# Altium PCB GATEWAY_PCB.PcbDoc (part 2 of 2)
Units mm, origin at the board's own origin, x right, y up, seen from the top; angles counter-clockwise.
Board outline 96.14 x 95.25 mm, 2 copper layers (Top Layer, Bottom Layer); 195 components, 120 nets, 640 pads, 100 vias.
Unrouted connection lines stored in the file: 256.
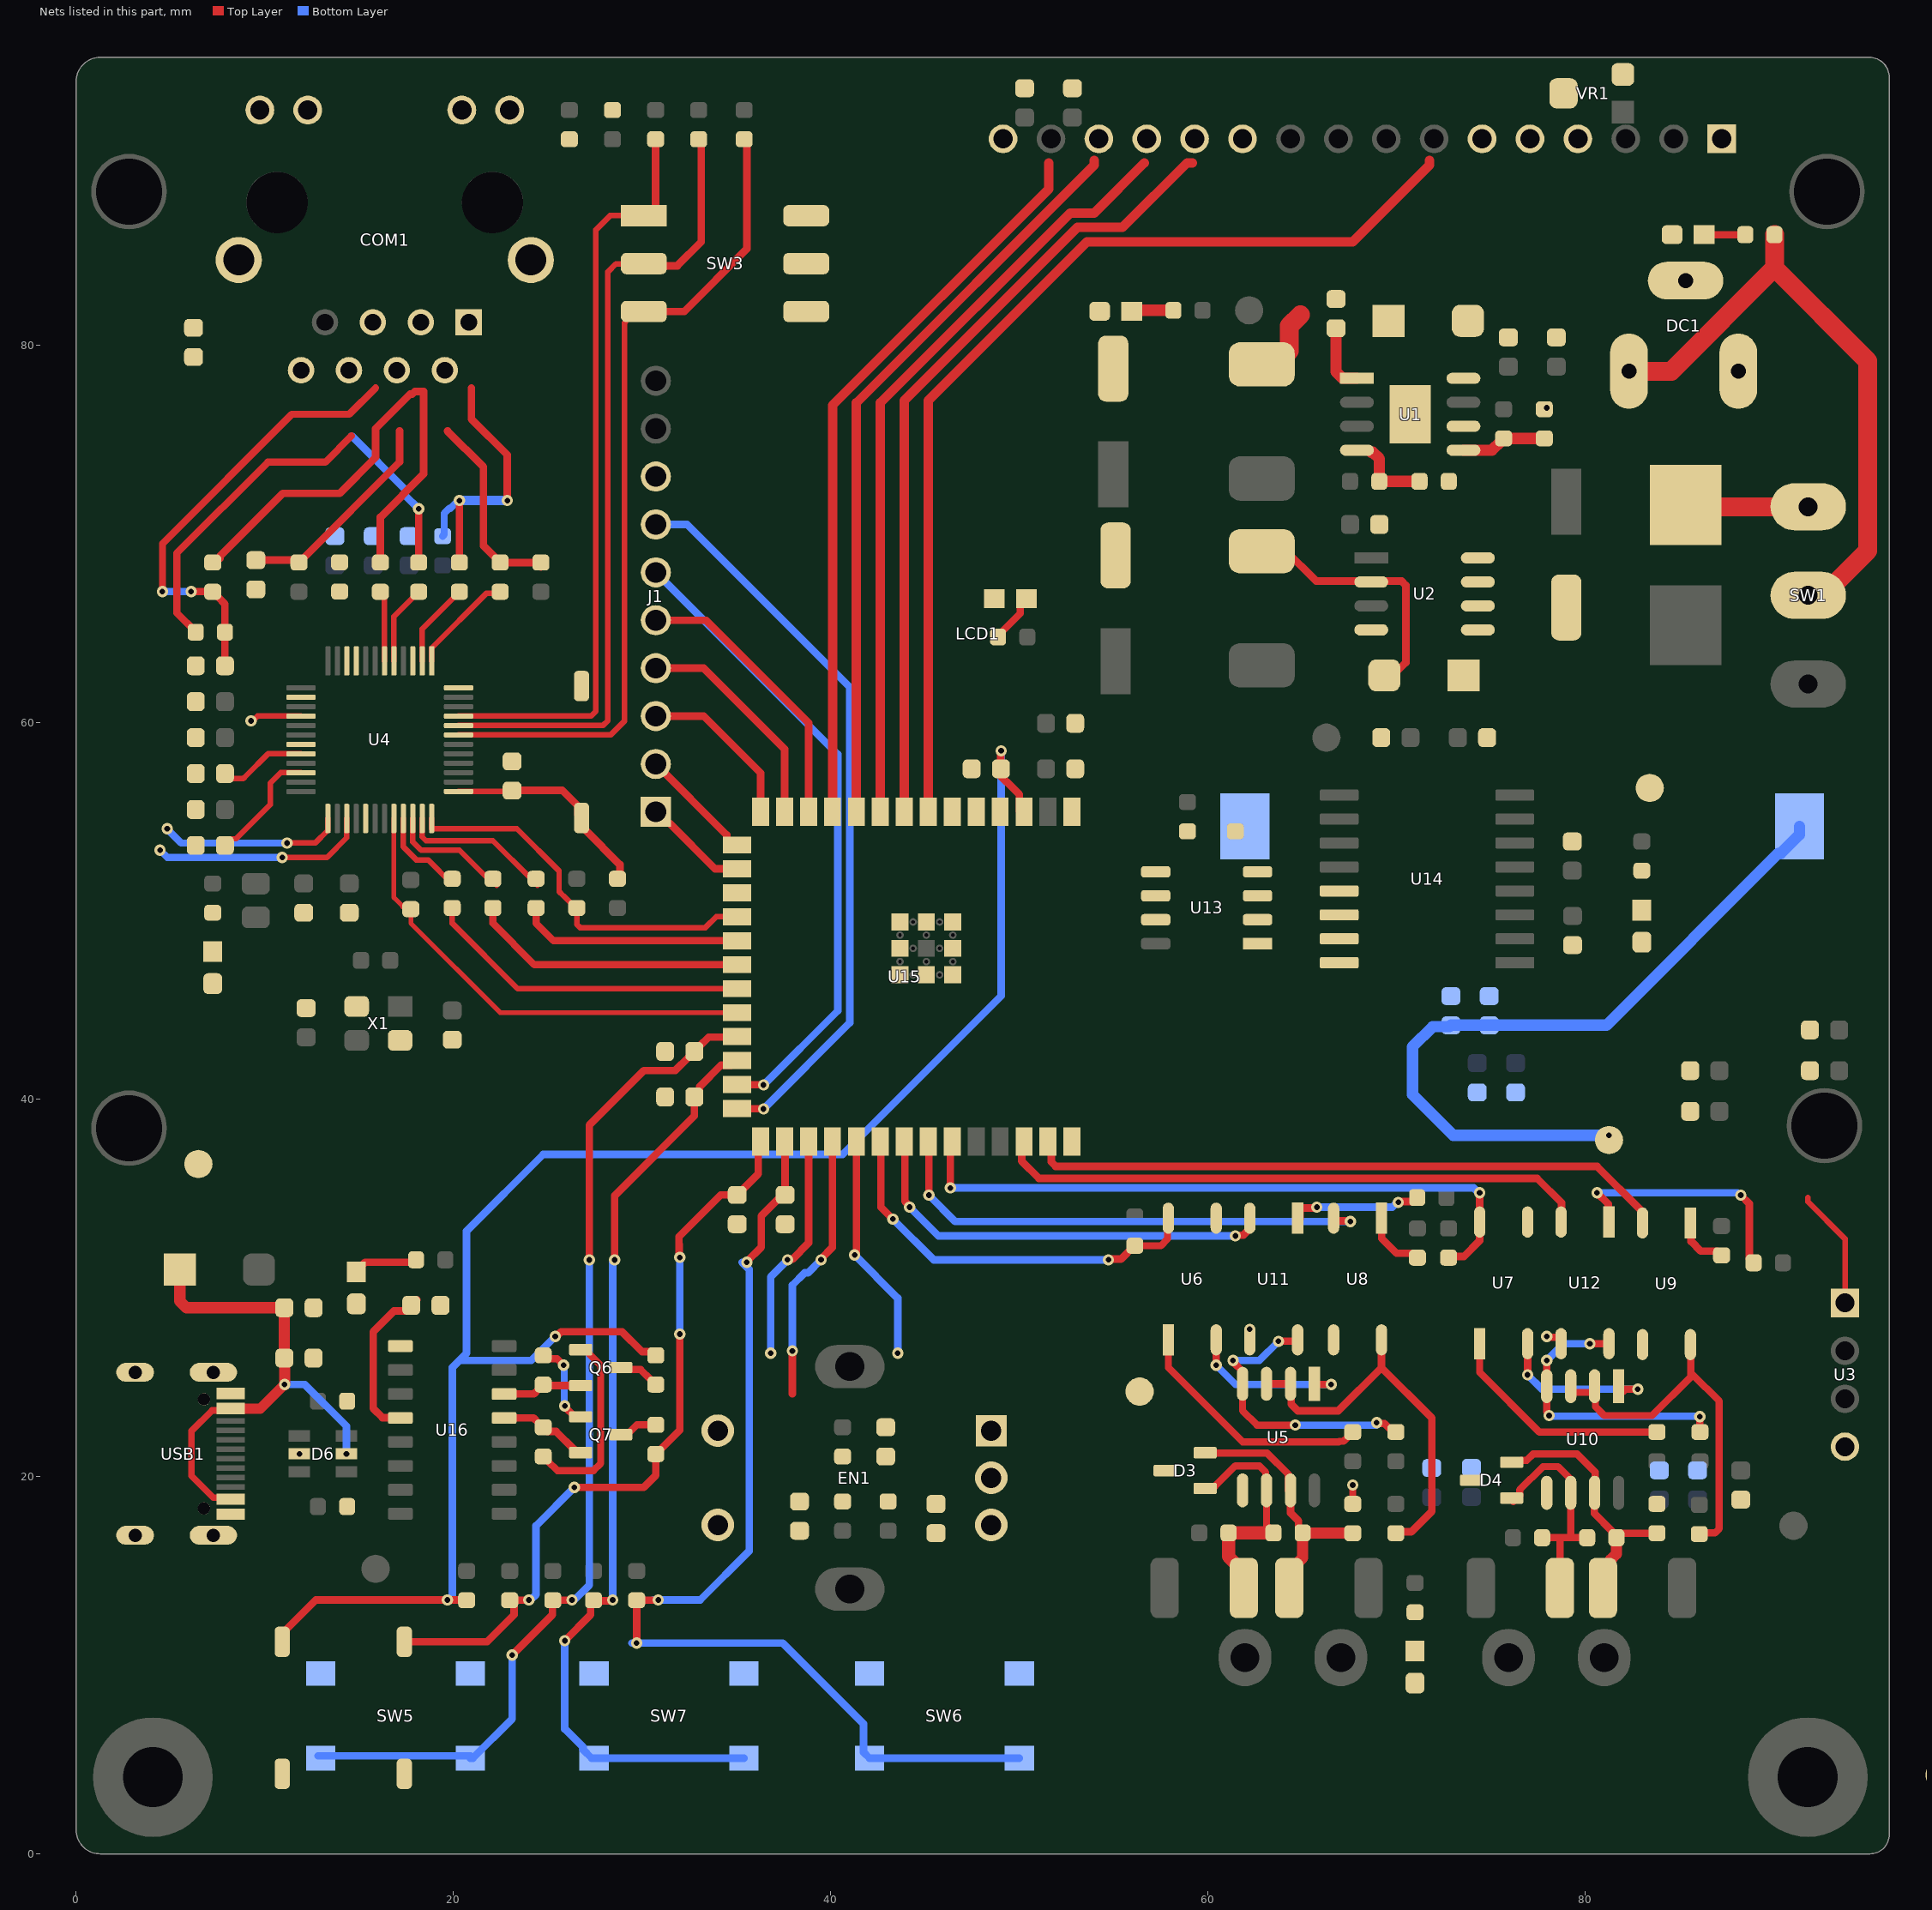
[diagram p2: the nets of this part, all layers, seen from the top]

## Via types
v1: diameter 0.6, hole 0.3, Top Layer to Bottom Layer, tented both sides, 85 vias
v2: diameter 0.6, hole 0.3, Top Layer to Bottom Layer, 14 vias
v3: diameter 0.25, hole 0.15, Top Layer to Bottom Layer, 1 vias

## Nets (pads, with @x,y where several pads share a name; then routed paths per layer and width w, separated by ;. In a path a pad name is that pad's centre, name@x,y a point inside that pad or via, vN(x,y) a via of type N, cw(c..) or ccw(c..) an arc to the next point about the centre after c; other vN are vias at no path point) (continued)
DEBUG_EN: C56.2 R74.1 R75.1 SW8.2 U15.3 | length 92.9
  Top Layer w0.4: SW8.2@10.922,11.245 11.122,11.445 11.122,11.884 12.7,13.462 v1@19.939,13.462 ; v1(19.685,13.462) 20.688,13.462 R74.1@20.701,13.449 ; v1(25.4,27.432) 25.454,27.432 25.708,27.686 28.944,27.686 30.006,26.624 30.539,26.624 R75.1@30.734,26.429 ; v1(49.048,58.484) 49.028,58.464 49.028,57.156 49.035,57.15 49.035,57.125 49.31,56.85 49.335,56.85 50.012,56.173 50.012,55.28 U15.3@50.056,55.237 ; U15.3@50.183,54.729 U15.3@50.187,54.724
  Bottom Layer w0.4: v1@19.939,13.462 19.939,25.781 20.32,26.162 ; v1(25.4,27.432) 24.13,26.162 20.32,26.162 ; v1(49.048,58.484) 49.048,45.492 40.64,37.084 24.765,37.084 20.701,33.02 20.701,26.543 20.32,26.162
DEBUG_FLASH: C58.2 R80.1 R81.2 SW9.2 U15.27 | length 39.6
  Top Layer w0.4: SW9.2@17.399,11.245 21.786,11.245 23.217,12.676 R81.2@23.217,13.298 ; R81.2@22.993,13.456 R81.2@23.247,13.456 ; R81.2@23.09,13.298 R81.2@23.247,13.456 ; v1(24.003,13.462) 23.997,13.456 R81.2@23.247,13.456 ; v1(26.416,19.431) 30.096,19.431 30.731,20.066 R80.1@30.731,21.193 ; R80.1@30.734,21.196 30.759,21.196 30.984,21.421 30.984,21.446 32.004,22.466 v1(32.004,27.559) ; v1(32.004,31.623) 31.966,31.661 31.966,32.318 31.961,32.323 31.961,32.723 34.176,34.938 C58.2@35.052,34.938 36.171,36.057 U15.27@36.171,37.056
  Bottom Layer w0.4: v1@24.098,13.462 24.384,13.748 24.384,17.399 v1(26.416,19.431) ; v1(32.004,27.559) v1(32.004,31.623)
DI1: R46.1 U5.4 U11.4 | length 15.3
  Top Layer w0.381: v1(61.341,26.162) 61.383,26.12 61.383,26.048 61.849,25.582 U5.4@61.849,24.923 61.849,23.495 62.611,22.733 v2(64.643,22.733) ; v1(63.754,27.178) 64.693,27.178 U11.4@64.77,27.255 ; v2(68.961,22.86) 69.003,22.818 69.372,22.818 69.825,22.365 R46.1@69.85,22.365
  Bottom Layer w0.381: v1@61.348,26.169 62.745,26.169 v1(63.754,27.178) ; v2(64.643,22.733) 64.664,22.733 64.674,22.743 64.684,22.733 v2@68.961,22.733
DI2: R48.1 U10.4 U12.4 | length 15.6
  Top Layer w0.381: v2(77.978,26.162) U10.4@77.978,24.796 77.978,23.427 78.105,23.3 v2(78.105,23.241) ; v2(80.264,27.051) U12.4@81.28,27.051 ; R48.1@86.106,22.365 R48.1@86.106,22.44
  Top Layer w0.4: v2(86.094,23.181) 86.1,23.176 86.1,22.371 R48.1@86.106,22.365
  Bottom Layer w0.381: v2(77.978,26.162) 78.867,27.051 v2(80.264,27.051) ; v2(78.105,23.241) 78.135,23.211 86.065,23.211 v2(86.094,23.181)
DTR: Q7.2 R76.1 U16.13 | length 4.5
  Top Layer w0.4: U16.13@22.689,23.114 24.253,23.114 24.515,22.852 24.515,22.844 R76.1@24.711,22.648 ; R76.1@24.765,22.619 24.99,22.394 25.446,22.394 26.438,21.402 Q7.2@26.499,21.402
EN1: R41.1 U5.2 U5.3 U8.4 | length 20.8
  Top Layer w0.4: U5.3@63.119,24.923 U5.2@64.389,24.923 64.427,24.885 64.427,23.838 64.77,23.495 66.929,23.495 69.215,25.781 ; U8.4@69.215,27.255 69.215,25.781 ; R41.1@69.977,17.005 70.044,17.072 70.793,17.072 71.882,18.161 71.882,23.114 69.215,25.781
EN1_RS485: U8.2 U15.34 | length 26.7
  Top Layer w0.4: v1(45.212,34.925) U15.34@45.212,37.759 ; U8.2@66.684,33.622 66.74,33.566 67.526,33.566 v1(67.564,33.528)
  Bottom Layer w0.4: v1(45.212,34.925) 46.609,33.528 v1(67.564,33.528)
EN2: R43.1 U9.4 U10.2 U10.3 | length 19.5
  Top Layer w0.381: U10.3@79.502,24.465 80.518,24.465 80.56,24.423 80.56,23.707 81.026,23.241 83.566,23.241 85.618,25.293 85.618,25.507 ; U9.4@85.618,26.981 85.618,25.507 ; R43.1@86.16,17.018 86.899,17.018 87.122,17.241 87.122,24.003 85.725,25.4 85.618,25.507
EN2_RS485: U9.2 U15.39 | length 34.2
  Top Layer w0.4: U15.39@51.532,37.759 51.705,37.586 51.705,36.683 51.939,36.449 80.645,36.449 82.958,34.136 82.958,34.13 83.058,34.03 U9.2@83.058,33.451
ENC_CLK: C47.2 EN1.A R69.1 U15.31 | length 12.2
  Top Layer w0.4: v1(41.275,31.75) 41.275,31.804 41.372,31.901 U15.31@41.372,37.759
  Bottom Layer w0.4: v1(41.275,31.75) 43.561,29.464 v1(43.561,26.543)
ENC_DATA: C48.2 EN1.B R70.1 U15.30 | length 14.4
  Top Layer w0.4: 37.973,24.384 v1(37.973,26.67) ; v1(39.497,31.496) 39.497,31.55 40.102,32.155 U15.30@40.102,37.759
  Bottom Layer w0.4: v1(37.973,26.67) 37.973,30.153 38.626,30.805 38.806,30.805 v1(39.497,31.496)
ENC_SW: C46.2 EN1.E R68.1 U15.29 | length 12.2
  Top Layer w0.4: v1(37.719,31.496) 37.757,31.534 37.98,31.534 38.832,32.387 U15.29@38.832,37.759
  Bottom Layer w0.4: v1(36.83,26.543) 36.83,30.597 37.719,31.486 v1(37.719,31.496)
GND: C1.2 C2.2 C3.2 C4.2 C6.2 C7.2 C8.2 C10.2 C11.2 C12.2 C13.2 C15.1 C16.1 C17.1 C18.1 C19.1 C20.1 C21.1 C22.1 C23.1 C24.1 C25.1 C26.1 C27.1 C28.1 C29.1 C30.1 C35.1 C36.1 C37.1 C38.1 C39.1 C40.1 C42.1 C43.1 C44.1 C45.1 C46.1 C47.1 C48.1 C49.1 C50.1 C51.1 C52.1 C53.1 C54.1 C55.1 C56.1 C57.1 C58.1 D1.1 D2.1 D6.2 DC1.2 DC1.3 EN1.C EN1.D J1.8 LCD1.1 LCD1.5 LCD1.16 LED1.2 LED2.2 LED3.2 LED4.2 LED12.2 LED15.2 R6.2 R7.2 R15.1 R82.2 R83.2 SW2.1 SW3.1_1 SW3.2_1 SW3.3_1 SW5.1 SW6.1 SW7.1 SW8.1 SW9.1 TP1.1 TP2.1 TP3.1 U1.6 U1.9 U2.4 U2.5 U2.6 U2.7 U2.8 U3.1 U4.3 U4.9 U4.14 U4.16 U4.19 U4.29 U4.48 U6.3 U7.3 U13.1 U13.2 U13.3 U13.4 U13.7 U14.13 U15.1 U15.40 U15.41_1 U15.41_2 U15.41_3 U15.41_4 U15.41_6 U15.41_7 U15.41_8 U15.41_9 U16.1 USB1.A1 USB1.B1 USB1.SHIELD VBAT1.N VR1.3 X1.2 X1.4 | length 9.2
  Top Layer w0.295: v1(9.271,60.071) 9.354,60.071 9.606,60.323 U4.16@11.916,60.323 ; R6.2@77.978,76.594 v1(77.978,76.669) ; 91.821,34.798 91.821,34.583 93.794,32.61 U3.1@93.794,29.21
  other v1: 11.831,21.209
GND_RJ45: C15.2 COM1.8 COM1.15 COM1.16
GND_RS485: C14.2 C31.2 C32.2 C33.2 C34.2 D3.3 D4.3 LED10.2 R33.2 R44.2 TP10.1 U3.4 U5.5 U8.3 U9.3 U10.5 U11.3 U12.3 | length 2.7
  Top Layer w0.381: U11.3@62.23,27.255 v2(62.23,27.813) ; R33.2@67.691,18.555 67.691,18.63 v2(67.691,19.558) ; v2(77.978,27.432) 78.02,27.39 78.639,27.39 78.74,27.289 U12.3@78.74,27.051 U12.3@78.689,27
I2C_N: R51.1 U13.5 U14.15 U15.4
I2C_P: R30.1 U13.6 U14.16 U15.5
IO3: J1.2 U15.15 | length 6.3
  Top Layer w0.4: J1.2@30.734,57.785 34.492,54.027 34.492,53.744 34.742,53.494 U15.15@35.042,53.494
IO8: J1.5 U15.12 | length 15.1
  Top Layer w0.4: J1.5@30.734,65.405 33.401,65.405 38.832,59.974 U15.12@38.832,55.259
IO9: LED5.2 U15.17
IO19: J1.4 U15.13 | length 11.9
  Top Layer w0.4: J1.4@30.734,62.865 33.274,62.865 37.562,58.577 U15.13@37.562,55.259
IO20: J1.3 U15.14 | length 8.9
  Top Layer w0.4: J1.3@30.734,60.325 33.274,60.325 36.292,57.307 U15.14@36.292,55.259
IO45: J1.7 U15.26 | length 39.5
  Top Layer w0.4: U15.26@35.042,39.524 35.056,39.511 36.435,39.511 v2(36.449,39.497)
  Bottom Layer w0.4: J1.7@30.734,70.485 32.385,70.485 41.021,61.849 41.021,44.069 36.456,39.504 36.442,39.504 v2(36.449,39.497)
IO46: J1.1 U15.16 | length 5.6
  Top Layer w0.4: J1.1@30.797,55.308 30.797,55.181 31.334,54.645 31.461,54.645 33.882,52.224 U15.16@35.042,52.224
IO48: J1.6 U15.25 | length 34.4
  Top Layer w0.4: U15.25@35.179,40.894 35.142,40.894 U15.25@35.042,40.794 35.056,40.781 36.435,40.781 v2(36.449,40.767)
  Bottom Layer w0.4: J1.6@30.734,67.945 40.386,58.293 40.386,44.704 36.456,40.774 36.442,40.774 v2(36.449,40.767)
LED1: COM1.11 U4.27 | length 11.5
  Top Layer w0.295: v1(10.922,52.832) 13.302,52.832 14.346,53.876 U4.27@14.346,54.893
  Bottom Layer w0.38: v1(4.445,53.213) 4.826,52.832 v1(10.922,52.832)
LED2: COM1.10 U4.25 | length 9.8
  Top Layer w0.295: v1(11.176,53.594) 12.671,53.594 13.346,54.268 U4.25@13.346,54.893
  Bottom Layer w0.38: v1(4.826,54.356) 4.826,54.331 5.563,53.594 v1(11.176,53.594)
NetC5_1: C5.1 U1.1 | length 3.6
  Top Layer w0.6: C5.1@66.802,80.902 66.802,78.583 67.153,78.232 U1.1@67.914,78.232
NetC5_2: C5.2 D2.2 L1.1 U1.8 | length 3.5
  Top Layer w1: L1.1@63.271,79.022 63.653,79.022 64.328,79.697 64.328,81.012 64.913,81.598
NetC24_2: C24.2 U4.22 | length 6.3
  Top Layer w0.295: C24.2@7.887,53.467 7.887,53.492 8.214,53.82 8.481,53.82 10.287,55.626 10.287,56.769 10.841,57.323 U4.22@11.916,57.323
NetC25_2: C25.2 U4.20 | length 4.5
  Top Layer w0.295: C25.2@7.919,57.023 8.868,57.023 9.017,57.172 10.169,58.323 U4.20@11.916,58.323
NetC26_2: C26.2 COM1.5 R20.1 R21.1 | length 24.3
  Top Layer w0.38: v1(4.572,66.929) 4.572,69.469 11.43,76.327 14.478,76.327 15.875,77.724
  Top Layer w0.4: v1(6.096,66.929) 6.102,66.923 7.233,66.923 R21.1@7.239,66.916 7.264,66.916 7.489,66.691 7.489,66.666 7.887,66.268 R20.1@7.887,64.77 ; C26.2@7.887,62.992 R20.1@7.887,64.795
  Bottom Layer w0.381: v1(4.572,66.929) v1@6.223,66.929
NetC27_2: C27.2 COM1.4 R19.2 | length 11.5
  Top Layer w0.4: C27.2@9.525,68.593 11.684,68.593 R19.2@11.811,68.466 11.829,68.466 12.053,68.69 12.053,68.708 17.15,73.805 17.15,75.438
NetC44_2: C44.2 R65.1 SW5.2 U15.23 | length 55.2
  Top Layer w0.4: v1(23.114,10.541) 25.249,12.676 25.249,13.298 R65.1@25.4,13.449 ; R65.1@25.254,13.456 26.283,13.456 v1(26.289,13.462) ; v1(27.205,31.491) 27.205,38.635 30.099,41.529 31.763,41.529 32.479,42.245 32.504,42.245 32.779,42.52 32.779,42.57 33.054,42.845 33.079,42.845 33.541,43.307 U15.23@35.428,43.307
  Bottom Layer w0.4: SW5.2@12.831,5.199 20.906,5.199 SW5.2@20.906,5.072 21.031,5.072 23.114,7.155 v1(23.114,10.541) ; v1@26.416,13.462 27.205,14.251 v1(27.205,31.491)
NetC45_2: C45.2 R66.1 SW6.2 U15.28 | length 55.7
  Top Layer w0.4: v1(29.718,11.176) R66.1@29.718,13.449 29.724,13.456 30.855,13.456 v1(30.861,13.462) ; v1(35.56,31.369) 35.56,31.401 36.322,32.163 36.322,33.82 37.389,34.887 C45.2@37.579,35.077 ; C45.2@37.592,34.938 U15.28@37.592,37.098
  Bottom Layer w0.4: v1@29.464,11.176 37.465,11.176 41.752,6.889 41.752,5.385 SW6.2@42.065,5.072 SW6.2@50.015,5.072 ; v1@30.607,13.462 33.089,13.462 35.687,16.06 35.687,30.988 v1@35.306,31.369
NetC49_2: C49.2 R72.2 SW7.2 U15.24 | length 50.7
  Top Layer w0.4: v1(25.908,11.303) 27.281,12.676 27.281,13.298 R72.2@27.432,13.449 27.445,13.462 R72.2@27.775,13.462 ; R72.2@27.775,13.424 28.41,13.424 v1(28.448,13.462) ; v1(28.548,31.491) 28.548,34.898 32.779,39.129 C49.2@32.779,40.157 ; C49.2@32.779,40.132 33.054,40.407 33.054,40.674 34.194,41.814 34.738,41.814 U15.24@35.215,42.291
  Bottom Layer w0.4: v1(25.908,11.303) 25.908,6.624 26.885,5.647 26.885,5.522 27.335,5.072 SW7.2@27.46,5.072 SW7.2@35.41,5.072 ; v1(28.448,13.462) 28.448,31.337 28.548,31.437 v1(28.548,31.491)
NetC57_2: C57.2 U16.4 | length 8.9
  Top Layer w0.4: U16.4@17.189,23.114 17.171,23.132 16.238,23.132 15.748,23.622 15.748,27.686 16.845,28.783 17.746,28.783 18.021,29.058 C57.2@18.021,29.083 ; C57.2@17.865,29.206 18.042,29.383 C57.2@18.067,29.383
NetCOM1_1: COM1.1 R17.1 R24.2 | length 14.9
  Top Layer w0.38: R24.2@20.32,68.466 v1(20.32,71.755)
  Top Layer w0.4: 20.96,77.724 20.96,76.068 22.86,74.168 v1(22.86,71.755)
  Bottom Layer w0.38: R17.1@19.431,69.863 19.514,69.946 19.514,71.076 19.783,71.345 19.85,71.345 20.26,71.755 v1(20.32,71.755)
  Bottom Layer w0.5: v1(20.32,71.755) v1(22.86,71.755)
NetCOM1_2: COM1.2 R16.1 R23.2 | length 10.2
  Top Layer w0.4: 19.69,75.438 21.59,73.538 21.59,69.355 R23.2@22.479,68.466 R16.1@24.384,68.466 ; R16.1@24.638,68.225 R16.1@24.759,68.345
NetCOM1_3: COM1.3 R21.2 R22.2 | length 25.7
  Top Layer w0.4: R21.2@7.366,68.541 7.466,68.541 7.616,68.691 7.616,68.791 10.961,72.136 13.97,72.136 15.875,74.041 15.875,75.565 17.706,77.396 17.817,77.396 17.954,77.533 18.415,77.533 18.415,73.152 16.129,70.866 R22.2@16.129,68.466
NetCOM1_6: COM1.6 R18.2 R20.2 | length 24.6
  Top Layer w0.38: R20.2@6.337,64.77 6.337,64.795 5.334,65.798 5.334,68.961 10.16,73.787 13.208,73.787 14.605,75.184
  Top Layer w0.4: v1(18.158,71.312) 18.158,68.605 R18.2@18.209,68.555
  Bottom Layer w0.4: 14.605,75.184 17.447,72.342 17.447,72.023 v1(18.158,71.312)
NetCOM1_9: COM1.9 R25.2
NetCOM1_12: COM1.12 R32.2
NetD1_2: D1.2 L2.1 U2.2 | length 13.2
  Top Layer w0.4: L2.1@63.525,69.139 64.1,69.139 65.751,67.488 67.884,67.488 67.896,67.475 68.663,67.475 68.676,67.488 68.689,67.475 69.456,67.475 69.468,67.488 70.276,67.488 70.51,67.253 70.51,63.17 D1.2@69.581,62.241
NetD3_1: D3.1 F2.1 R38.1 R39.2 U5.6 | length 12.8
  Top Layer w0.381: D3.1@59.861,19.37 59.97,19.479 60.373,19.479 61.468,20.574 62.738,20.574 63.077,20.235 U5.6@63.077,19.332 ; U5.6@63.119,19.273 63.119,17.411 63.487,17.043 R38.1@63.487,17.018
  Top Layer w0.7: F2.1@61.917,14.097 61.917,14.947 61.1,15.764 R39.2@61.1,17.018 61.175,17.018 61.227,17.018 R38.1@63.487,17.018
NetD3_2: D3.2 F1.1 R33.1 R38.2 U5.7 | length 13.9
  Top Layer w0.381: D3.2@59.882,21.249 63.15,21.249 64.271,20.128 U5.7@64.271,19.273
  Top Layer w0.4: U5.7@64.389,19.273 64.389,18.084 64.812,17.661 64.812,17.243 R38.2@65.037,17.018
  Top Layer w0.6: F1.1@64.389,14.268 64.389,15.056 65.037,15.704 R38.2@65.037,17.018 ; R38.2@65.071,17.005 R33.1@67.691,17.005
NetD4_1: D4.1 F4.1 R49.1 R50.2 U10.6 | length 12.1
  Top Layer w0.381: D4.1@76.2,18.673 76.2,18.958 76.528,18.958 76.542,18.971 76.542,19.3 77.778,20.536 78.578,20.536 79.326,19.788 U10.6@79.29,19.752 ; R50.2@77.737,16.764 78.827,16.764 ; F4.1@78.681,14.097 78.681,16.618 78.827,16.764 ; U10.6@79.248,19.146 79.248,16.824 79.308,16.764 ; R49.1@80.124,16.764 79.308,16.764 ; 78.827,16.764 79.308,16.764
NetD4_2: D4.2 F3.1 R44.1 R49.2 U10.7 | length 13.6
  Top Layer w0.258: U10.7@80.581,18.605 U10.7@80.581,18.929 ; R49.2@81.674,16.764 81.674,16.805 R49.2@81.71,16.841
  Top Layer w0.381: D4.2@76.498,20.762 76.607,20.872 76.923,20.872 77.257,21.206 79.586,21.206 80.547,20.245 U10.7@80.547,19.04 ; R49.2@81.674,16.764 R49.2@81.915,17.005 ; R49.2@81.967,17.005 R44.1@83.82,17.005
  Top Layer w0.4: U10.7@80.581,18.605 80.498,18.522 80.498,18.053 81.457,17.095 81.457,17.013 81.628,16.841 R49.2@81.71,16.841
  Top Layer w0.6: F3.1@80.899,14.274 81.362,14.737 81.362,15.587 81.674,15.899 R49.2@81.674,16.764
NetFuse1_1: Fuse1.1 SW1.1 | length 6.4
  Top Layer w1: Fuse1.1@85.496,71.564 85.636,71.425 SW1.1@91.846,71.425
NetLCD1_4: LCD1.4 U15.6
NetLCD1_6: LCD1.6 U15.7 | length 54.1
  Top Layer w0.5: U15.7@45.061,55.259 45.061,55.388 U15.7@45.182,55.509 ; U15.7@45.182,55.259 U15.7@45.182,55.509 ; 71.755,89.789 71.755,89.535 67.691,85.471 53.594,85.471 45.182,77.059 U15.7@45.182,55.509
NetLCD1_11: LCD1.11 U15.8 | length 42.3
  Top Layer w0.5: U15.8@43.912,55.259 43.912,77.059 53.086,86.233 55.477,86.233 58.906,89.662 59.182,89.662
NetLCD1_12: LCD1.12 U15.9 | length 41.2
  Top Layer w0.5: U15.9@42.521,55.259 42.521,55.138 U15.9@42.642,55.259 42.642,76.932 52.705,86.995 53.975,86.995 56.642,89.662
NetLCD1_13: LCD1.13 U15.10 | length 39.8
  Top Layer w0.5: U15.10@41.372,55.259 41.372,76.932 53.975,89.535 53.975,89.789
NetLCD1_14: LCD1.14 U15.11 | length 39.4
  Top Layer w0.5: U15.11@39.981,55.259 39.981,55.138 U15.11@40.102,55.259 40.102,76.805 51.562,88.265 51.562,89.662
NetLED1_1: LED1.1 R1.2 | length 2.2
  Top Layer w0.38: LED1.1@86.324,85.851 R1.2@88.506,85.852
NetLED2_1: LED2.1 R2.2 | length 1.8
  Top Layer w0.6: LED2.1@56.249,81.837 56.251,81.839 R2.2@58.051,81.839
NetLED3_1: LED3.1 R3.2 | length 2.5
  Top Layer w0.38: R3.2@48.939,64.642 48.983,64.642 49.117,64.776 49.117,64.82 50.067,65.769 50.067,66.24 50.377,66.55 LED3.1@50.383,66.55
NetLED4_1: LED4.1 R8.2
NetLED5_1: LED5.1 R9.2
NetLED10_1: LED10.1 R55.2
NetLED12_1: LED12.1 R61.2
NetLED15_1: LED15.1 R78.2 | length 3.4
  Top Layer w0.4: LED15.1@14.859,30.861 14.859,30.911 15.317,31.369 R78.2@18.021,31.369
NetQ6_1: Q6.1 R76.2 | length 10.2
  Top Layer w0.38: R76.2@24.765,21.069 24.79,21.069 25.025,20.834 25.025,20.809 25.514,20.32 27.432,20.32 27.813,20.701 27.813,25.908 27.178,26.543 27.178,26.621 27.068,26.731 Q6.1@26.753,26.731
NetQ6_3: Q6.3 R75.2 | length 2.2
  Top Layer w0.38: Q6.3@28.873,25.781 28.973,25.681 29.932,25.681 30.474,25.139 30.474,25.114 30.709,24.879 R75.2@30.734,24.879
NetQ7_1: Q7.1 R79.2 | length 4.5
  Top Layer w0.381: R79.2@24.892,26.429 24.892,26.382 25.025,26.25 25.507,26.25 v1(25.849,25.908) ; v1(25.908,23.749) 25.908,23.705 26.438,23.175 Q7.1@26.753,23.175
  Bottom Layer w0.381: v1(25.849,25.908) 25.878,25.878 25.878,23.779 v1(25.908,23.749)
NetQ7_3: Q7.3 R80.2 | length 2.2
  Top Layer w0.38: Q7.3@28.619,22.352 Q7.3@28.729,22.242 ; Q7.3@28.873,22.225 28.983,22.335 29.32,22.335 29.731,22.746 R80.2@30.734,22.746
NetR4_2: R4.2 R6.1 U1.5 | length 4.6
  Top Layer w0.6: U1.5@73.564,74.422 75.07,74.422 75.542,74.894 75.542,74.919 75.667,75.044 R4.2@75.692,75.044 R6.1@77.851,75.044
NetR5_2: R5.2 R7.1 U1.4 | length 4
  Top Layer w0.6: U1.4@68.676,74.32 68.75,74.32 69.101,73.969 R5.2@69.101,72.824 ; R5.2@69.101,72.771 R7.1@71.361,72.771
NetR10_1: R10.1 U4.32 U15.22 | length 25.3
  Top Layer w0.254: U4.32@16.846,54.893 16.846,50.705 17.33,50.221 17.33,50.196 R10.1@17.59,49.936 ; R10.1@17.742,50.088 17.742,49.342 22.48,44.604 U15.22@35.042,44.604
NetR11_1: R11.1 U4.36 U15.18 | length 20.3
  Top Layer w0.295: U4.36@18.846,54.893 18.846,54.364 18.853,54.356 23.368,54.356 25.606,52.118 25.606,51.021 25.82,50.807 25.828,50.807 26.483,50.152 R11.1@26.543,50.152 26.543,49.281 26.716,49.108 33.36,49.108 33.936,49.684 U15.18@35.042,49.684
NetR12_1: R12.1 U4.35 | length 8.2
  Top Layer w0.295: U4.35@18.346,54.893 18.346,53.917 18.542,53.721 22.098,53.721 24.081,51.738 24.081,51.725 24.454,51.353 R12.1@24.466,51.353
NetR12_2: R12.2 U15.19 | length 11.9
  Top Layer w0.38: R12.2@24.384,50.152 24.384,49.342 25.312,48.414 U15.19@35.042,48.414
NetR13_1: R13.1 U4.34 | length 6.7
  Top Layer w0.295: U4.34@17.846,54.893 17.846,53.655 18.288,53.213 20.32,53.213 21.795,51.738 R13.1@21.795,51.725 ; R13.1@21.795,51.852 22.294,51.354 R13.1@22.306,51.354
NetR13_2: R13.2 U15.20 | length 14.7
  Top Layer w0.38: R13.2@22.098,50.152 22.098,49.342 24.296,47.144 U15.20@35.042,47.144
NetR14_1: R14.1 U4.33 | length 4.8
  Top Layer w0.295: 17.346,53.393 U4.33@17.346,54.893 ; 17.398,53.341 18.034,52.705 18.657,52.705 19.914,51.448 R14.1@19.939,51.448
NetR14_2: R14.2 U15.21 | length 17.3
  Top Layer w0.3: R14.2@19.939,50.152 19.939,49.342 23.407,45.874 U15.21@35.042,45.874
NetR15_2: R15.2 U4.10
NetR35_1: R35.1 U6.1 | length 12.7
  Top Layer w0.381: U6.1@57.912,27.255 57.912,25.781 61.849,21.844 66.954,21.844 66.987,21.876 67.202,21.876 R35.1@67.437,22.111
NetR37_1: R37.1 U7.1 | length 11.7
  Top Layer w0.381: U7.1@74.422,26.543 74.422,25.527 77.584,22.365 R37.1@83.82,22.365
NetR40_1: R40.1 U8.1 | length 3.3
  Top Layer w0.381: U8.1@69.224,33.622 69.226,33.62 69.226,32.628 70.009,31.845 70.885,31.845 R40.1@71.12,31.61
NetR42_1: R42.1 U9.1 | length 2.8
  Top Layer w0.4: U9.1@85.584,33.338 85.636,33.286 85.636,32.474 86.148,31.962 87.024,31.962 R42.1@87.249,31.737
NetR45_1: R45.1 U11.1 | length 6.9
  Top Layer w0.4: U11.1@64.906,33.678 64.906,34.149 64.998,34.241 65.683,34.241 65.732,34.29 v1(65.786,34.29) ; v1(70.104,34.544) 70.142,34.582 70.891,34.582 R45.1@71.107,34.798
  Bottom Layer w0.4: v1(65.786,34.29) 69.796,34.29 70.05,34.544 v1(70.104,34.544)
NetR47_1: R47.1 U12.1 | length 13.4
  Top Layer w0.4: v1(80.645,35.052) 81.242,34.455 81.242,33.539 U12.1@81.28,33.501 ; v1(88.265,34.925) 88.725,34.465 88.725,31.564 R47.1@88.95,31.339
  Bottom Layer w0.4: v1(80.645,35.052) 88.084,35.052 88.211,34.925 v1(88.265,34.925)
PMODE0: R28.1 SW3.1 U4.45 | length 40.2
  Top Layer w0.295: U4.45@20.276,60.323 27.303,60.323 27.559,60.579 27.559,86.106 28.309,86.856 SW3.1@30.1,86.856
  Top Layer w0.4: SW3.1@30.1,86.856 30.357,86.856 30.722,87.221 R28.1@30.722,90.907
PMODE1: R27.1 SW3.2 U4.44 | length 42.9
  Top Layer w0.295: U4.44@20.276,59.823 27.929,59.823 28.194,60.088 28.194,83.88 28.611,84.297 30.081,84.297 SW3.2@30.1,84.316
  Top Layer w0.4: SW3.2@30.1,84.201 31.877,84.201 33.147,85.471 R27.1@33.147,90.907
PMODE2: R26.1 SW3.3 U4.43 | length 44.2
  Top Layer w0.295: U4.43@20.276,59.323 28.335,59.323 29.083,60.071 29.083,81.186 29.111,81.214 29.111,81.369 29.518,81.776 SW3.3@30.1,81.776
  Top Layer w0.4: SW3.3@30.1,81.776 32.246,81.776 35.56,85.09 R26.1@35.56,90.832
RESET: C30.2 R31.2 SW2.2 U4.37 | length 12.6
  Top Layer w0.295: U4.37@20.276,56.323 22.937,56.323 C30.2@23.127,56.133 ; C30.2@23.114,56.121 C30.2@23.381,56.388 ; SW2.2@26.797,54.922 27.05,54.67 SW2.2@27.05,54.23
  Top Layer w0.4: C30.2@23.381,56.388 25.781,56.388 26.597,55.572 26.597,55.122 SW2.2@26.797,54.922 26.997,54.722 26.997,54.283 28.829,52.451 R31.2@28.829,51.513
RO1: U5.1 U6.2 | length 8.8
  Top Layer w0.381: v1(60.452,25.908) U6.2@60.452,27.255 ; U5.1@65.659,24.923 65.69,24.892 v1(66.548,24.892)
  Bottom Layer w0.381: v1(60.452,25.908) 61.468,24.892 v1(66.548,24.892)
RO2: U7.2 U10.1 | length 8.6
  Top Layer w0.4: v1(76.962,25.4) U7.2@76.962,27.051 ; U10.1@82.042,24.542 82.138,24.638 v1(82.804,24.638)
  Bottom Layer w0.4: v1(76.962,25.4) 77.724,24.638 v1(82.804,24.638)
RTS: Q6.2 R79.1 U16.14 | length 4.3
  Top Layer w0.4: U16.14@22.689,24.384 24.27,24.384 24.515,24.629 24.515,24.654 24.74,24.879 R79.1@24.765,24.879 24.813,24.831 Q6.2@26.753,24.831
RX1_RS485: R34.1 U6.4 U15.32 | length 20.7
  Top Layer w0.381: R34.1@56.134,32.245 57.518,32.245 57.87,32.597 57.87,33.663 U6.4@57.912,33.705
  Top Layer w0.4: U15.32@42.672,37.049 42.672,34.29 v1(43.307,33.655) ; v1(54.737,31.496) 54.775,31.534 55.398,31.534 56.109,32.245 R34.1@56.134,32.245
  Bottom Layer w0.4: v1(43.307,33.655) 45.466,31.496 v1(54.737,31.496)
RX2_RS485: R36.1 U7.4 U15.35 | length 35
  Top Layer w0.4: v1(46.355,35.306) 46.355,37.404 U15.35@46.46,37.509 ; R36.1@72.771,31.61 72.838,31.677 73.587,31.677 74.418,32.508 74.418,33.497 U7.4@74.422,33.501 v1(74.422,35.052)
  Bottom Layer w0.4: v1(46.355,35.306) 74.114,35.306 74.368,35.052 v1(74.422,35.052)
RX_N: R18.1 U4.5 | length 4.2
  Top Layer w0.295: U4.5@16.846,63.253 16.846,65.601 R18.1@18.161,66.916
RX_P: R22.1 U4.6 | length 3.8
  Top Layer w0.295: R22.1@16.129,66.916 16.346,66.699 U4.6@16.346,63.253
TX1_RS485: U11.2 U15.33 | length 22.3
  Top Layer w0.4: U15.33@43.942,37.054 43.942,34.598 44.196,34.344 v1(44.196,34.29) ; v1(61.468,32.766) 61.506,32.804 61.889,32.804 62.23,33.145 U11.2@62.23,33.705
  Bottom Layer w0.4: v1(44.196,34.29) 45.72,32.766 v1(61.468,32.766)
TX2_RS485: U12.2 U15.38 | length 30.9
  Top Layer w0.4: U15.38@50.133,37.064 50.133,36.735 51.054,35.814 77.47,35.814 78.763,34.521 U12.2@78.763,33.501
TX_N: R23.1 U4.1 | length 5.5
  Top Layer w0.295: U4.1@18.846,63.253 18.846,63.931 21.759,66.844 22.407,66.844 R23.1@22.479,66.916
TX_P: R24.1 U4.2 | length 4.5
  Top Layer w0.295: U4.2@18.346,63.253 18.346,64.942 R24.1@20.32,66.916
VBAT: C39.2 C40.2 TP4.1 U14.14 VBAT1.P | length 39.5
  Bottom Layer w0.6: C39.2@72.898,43.929 72.825,43.856 71.923,43.856 70.866,42.799 70.866,40.259 73.025,38.1 v1(81.28,38.1) ; C39.2@72.898,43.942 74.93,43.942 81.153,43.942 90.244,53.033 90.376,53.033 91.376,54.033 VBAT1.P@91.376,54.483
VBUS: C50.2 C51.2 D5.1 D6.5 USB1.A4 USB1.B4 | length 28.1
  Top Layer w0.3: USB1.B4@8.156,18.888 USB1.B4@8.255,18.789
  Top Layer w0.35: USB1.B4@8.156,18.888 7.274,18.888 6.113,20.049 6.113,22.423 7.2,23.509 8.09,23.509 USB1.A4@8.191,23.611
  Top Layer w0.55: USB1.A4@8.191,23.611 9.768,23.611 v1(11.049,24.892)
  Top Layer w0.6: D5.1@5.493,30.977 5.493,29.308 5.844,28.956 C51.2@11.036,28.956 C50.2@11.036,26.289 11.049,26.276 v1(11.049,24.892)
  Bottom Layer w0.4: v1(11.049,24.892) 12.119,24.892 14.331,22.68 v1(14.331,21.209)
VIN: DC1.1 R1.1 SW1.2 | length 32.9
  Top Layer w1: DC1.1@82.338,78.613 84.582,78.613 90.056,84.087 ; R1.1@90.056,85.852 90.056,84.087 ; SW1.2@91.846,66.725 92.633,66.725 94.996,69.088 94.996,79.147 90.056,84.087
Vo: VR1.2
pads on no net: "LCD1.Hole 0" COM1. COM1.7 EN1.SH1 EN1.SH2 LCD1.3 LCD1.7 LCD1.8 LCD1.9 LCD1.10 MH1.1 MH3.1 MH4.1 SW1.3 U1.2 U1.3 U4.7 U4.12 U4.13 U4.18 U4.23 U4.24 U4.26 U4.38 U4.39 U4.40 U4.41 U4.42 U4.46 U4.47 U14.1 U14.3 U14.4 U14.5 U14.6 U14.7 U14.8 U14.9 U14.10 U14.11 U14.12 U15.41_5 U15.41_10 U15.41_11 U15.41_12 U15.41_13 U15.41_14 U15.41_15 U15.41_16 U15.41_17 U15.41_18 U15.41_19 U15.41_20 U15.41_21 U16.7 U16.8 U16.9 U16.10 U16.11 U16.12 U16.15 USB1.A8 USB1.B8
copper on no net: | length 367
  Top Layer w0.295: 7.887,55.372 v1(8.89,55.372) ; 7.887,58.801 7.903,58.817 7.903,59.182 ; 7.887,59.182 7.903,59.182 ; v1@8.89,55.245 9.779,56.134 9.779,57.15 10.452,57.823 11.916,57.823 ; 10.033,34.671 11.816,34.671 11.943,34.544 ; 11.811,66.916 11.879,66.848 v1(11.879,65.532) 13.355,65.532 14.346,64.541 14.346,63.253 ; 11.916,59.823 10.166,59.823 9.525,59.182 v1(8.89,59.182) 7.903,59.182 ; 11.916,60.823 10.668,60.823 8.163,60.823 7.903,60.563 7.903,59.182 ; 15.367,63.581 v1(15.367,65.532) ; 17.346,63.253 17.346,65.053 17.951,65.659 v1(18.034,65.659)
  Top Layer w0.38: 9.525,51.436 9.525,53.805 v1(10.245,54.525) ; v1(24.638,65.532) 24.638,66.681 24.675,66.718 24.764,66.718
  Top Layer w0.5: 46.452,55.271 46.452,77.186 53.848,84.582 71.882,84.582 76.835,89.535 76.835,89.789 ; 76.962,89.662 77.326,90.026
  Top Layer w0.6: v1(18.669,9.271) 50.673,9.271 53.213,11.811 53.213,26.543 56.473,29.803 90.085,29.803 93.044,26.844 93.62,26.844 93.794,26.67 ; 78.841,92.583 78.841,90.572 79.502,89.911 79.502,89.812
  Top Layer w0.8: 54.87,73.025 54.991,73.146 ; 70.575,68.835 71.971,70.231 75.184,70.231 76.708,68.707 76.708,60.579 77.851,59.436 87.516,59.436 90.043,59.436 93.612,55.867 93.612,44.958 93.612,43.815 93.612,42.545 93.612,41.529 93.612,39.116 93.612,37.973 95.282,36.303 95.282,27.934 94.372,27.024 94.34,27.024 93.986,26.67 93.794,26.67
  Bottom Layer w0.254: 12.425,89.228 12.425,89.26 12.446,89.281
  Bottom Layer w0.38: v1(8.89,59.182) v1(8.89,55.372) ; v1@10.287,54.483 v1(10.245,54.525) 9.61,54.525 8.89,55.245 v1(8.89,55.372) ; 13.843,68.313 15.748,68.313 17.653,68.313 ; v1@24.511,65.532 22.11,65.532 19.329,68.313 17.653,68.313 ; v1(8.89,55.372) 3.906,55.372 3.302,55.976 3.302,64.643 4.191,65.532 v1(11.879,65.532) v1(15.367,65.532) 17.847,65.532 17.974,65.659 v1(18.034,65.659) 18.034,65.719 17.653,66.1 17.653,68.313
  Bottom Layer w0.5: v1(62.992,92.075) 62.992,92.048 62.877,91.933 62.877,82.895 63.017,82.755 63.017,82.728
  Bottom Layer w0.6: 8.76,81.024 8.76,81.078 ; 24.132,81.278 24.255,81.155 ; 24.255,81.278 24.255,81.155 ; 24.257,81.153 24.255,81.155
  Bottom Layer w0.8: 8.662,81.175 8.76,81.078 8.809,81.028 8.809,78.44 12.065,75.184 ; 9.79,30.977 18.669,22.098 v1(18.669,9.271) ; 30.734,75.565 32.639,75.565 35.179,73.025 v2(51.435,73.025)
  other v1: 25.781,16.891 73.986,21.475 25.146,29.21 50.673,34.417
  other v3: 0,0

## Polygon pours and split planes (outlines as drawn)
GND_RS485 on Top Layer "NONET_L01_P003" (solid, remove dead copper, shelved, pour order 3): -43.561,-104.013 -43.561,-76.441 -41.101,-73.981 -2.988,-73.981 -2.921,-73.914 -2.921,-104.013
GND on Top Layer "NONET_L01_P000" (solid, remove dead copper, shelved, pour order 0): -44.704,-104.013 -97.917,-104.013 -98.806,-103.124 -98.806,-10.033 -97.536,-8.763 -4.191,-8.763 -2.921,-10.033 -2.921,-73.817 -42.996,-73.756 -44.831,-75.59 -44.831,-103.886
GND on Bottom Layer "NONET_L02_P001" (solid, remove dead copper, shelved, pour order 1): -44.905,-103.551 -44.905,-75.976 -43.478,-74.549 -2.981,-74.549 -2.981,-9.719 -3.937,-8.763 -98.044,-8.763 -98.806,-9.525 -98.806,-103.632 -98.552,-103.886
GND_RS485 on Bottom Layer "NONET_L02_P002" (solid, remove dead copper, shelved, pour order 2): -43.561,-104.013 -43.561,-76.327 -41.148,-73.914 -2.921,-73.914 -2.921,-104.013

## Keep-outs
Top Layer:
  lines w1: 54.61,0.381 54.61,26.416 56.896,28.702 86.741,28.702 88.9,28.702 89.027,28.575 92.202,25.4 95.631,25.4
Bottom Layer:
  lines w1: 54.61,0.508 54.61,26.416 56.896,28.702 88.773,28.702 92.075,25.4 95.504,25.4
Keep-Out Layer:
  the board outline again, w0.5

## Other copper
Top Layer:
  region net NetFuse1_1: 83.693,72.644 93.091,72.644 93.726,72.009 93.726,70.866 93.091,70.231 83.693,70.231
  region net +VCC: 72.771,77.265 74.979,77.265 75.311,77.597 75.311,79.375 79.502,79.375 80.01,78.867 80.01,70.485 78.672,70.485 78.672,77.429 78.378,77.724 76.708,77.724 76.327,77.343 76.327,76.2 75.311,76.2 74.858,76.653 72.771,76.653
  region net +3.3V: 69.596,66.548 69.596,65.852 66.36,65.852 64.643,64.135 64.643,61.849 57.277,61.849 56.896,61.468 54.204,61.468 54.204,65.024 58.674,65.024 60.198,66.548
  region net B2: 85.897,15.875 84.074,15.875 84.074,12.065 83.312,11.303 82.296,11.303 81.661,11.938 80.391,11.938 79.629,11.176 79.629,9.652 80.391,8.89 81.661,8.89 82.423,9.652 84.205,9.652 85.897,11.395
  region net A1: 56.896,15.875 58.928,15.875 58.928,12.065 59.69,11.303 60.706,11.303 61.341,11.938 62.611,11.938 63.373,11.176 63.373,9.652 62.611,8.89 61.341,8.89 60.579,9.652 58.797,9.652 56.896,11.61
  region net B1: 69.342,15.875 69.342,10.541 67.691,8.89 66.421,8.89 65.659,9.652 65.659,11.176 66.421,11.938 67.437,11.938 67.691,12.192 67.691,15.875
  region net +VCC: 83.591,63.424 87.401,63.424 87.401,67.742 83.896,67.742 80.061,71.577 80.061,74.346 78.232,74.346 78.232,70.993 83.591,65.634
  region net A2: 73.66,15.875 73.66,10.541 75.311,8.89 76.581,8.89 77.343,9.652 77.343,11.176 76.581,11.938 75.565,11.938 75.311,12.192 75.311,15.875

## Silkscreen, mask and mechanical layers (free items; w line width, h text height)
Top Overlay:
  text "1" at 38.492,89.424 h2.4 r90
  text "0" at 40.778,89.424 h2.4 r90
  text "LAN PORT" at 1.544,86.873 h3 r270
  text "12 - 24 VDC" at 71.31,84.852 h2.3
  text "5V PWR" at 53.912,84.367 h2
  text "5V" at 62.611,83.566 h2
  text "ETHERNET RESET" at 26.559,82.738 h2 r270
  text "PHY MODE" at 44.665,78.185 h2 r90
  text "3V3" at 32.512,77.615 h1.5
  text "Bits  2  1  0" at 42.429,76.931 h2.4 r90
  text "GPIOs EXTENSION" at 36.342,76.873 h2 r270
  text "5V" at 32.512,75.075 h1.5
  text "IO45" at 32.512,72.535 h1.5
  text "IO48" at 32.512,69.995 h1.5
  text "IO8" at 32.512,67.328 h1.5
  text "IO19" at 32.512,64.915 h1.5
  text "IO20" at 32.512,62.375 h1.5
  text "IO3" at 32.512,59.835 h1.5
  text "3.3V" at 60.661,58.332 h2
  text "IO46" at 32.385,57.295 h1.5
  text "GND" at 76.748,55.665 h2.3
  text "IO9" at 32.385,54.501 h1.5
  text "3V3 RJ45" at 1.339,50.093 h2 r270
  text "VBAT" at 73.804,36.615 h2
  text "GND" at 0.943,33.073 h2
  text "DEBUG PWR" at 13.208,32.893 h2
  text "GND RS485" at 54.445,22.772 h2 r270
  text "5V RS485" at 90.521,15.565 h1.5 r270
  text "GND RS485" at 93.382,15.557 h1.5 r270
  text "3V3 DEBUG" at 0.762,14.097 h2.2
  text "TYPE-C" at 0.818,11.8 h2
  text "MODBUS RTU" at 63.628,5.35 h2.5
  text "PORT 2" at 74.24,2.556 h2.5
  text "PORT 1" at 59.889,2.429 h2.5
  text "RESET" at 7.53,1.032 h2.5
  text "BOOT" at 16.039,1.032 h2.5
Bottom Overlay:
  text "LCD 16x4A" at 82.851,85.995 h2
  text "ESP32 - GATEWAY" at 31.381,24.91 h2.5
  text "VERSION 1.0.0" at 31.508,22.37 h2.5
  text "DESIGNED BY XUAN PHAT" at 31.623,19.715 h2.5
  text "B1-" at 68.521,13.374 h2.5
  text "A1+" at 63.5,13.335 h2.5
  text "A2+" at 77.597,13.208 h2.5
  text "B2-" at 82.931,13.208 h2.5